# Altium PCB StabdUp.PcbDoc
Units mm, origin at the board's own origin, x right, y up, seen from the top; angles counter-clockwise.
Board outline 46.2 x 37.46 mm, 2 copper layers (Top Layer, Bottom Layer); 29 components, 31 nets, 147 pads, 159 vias.
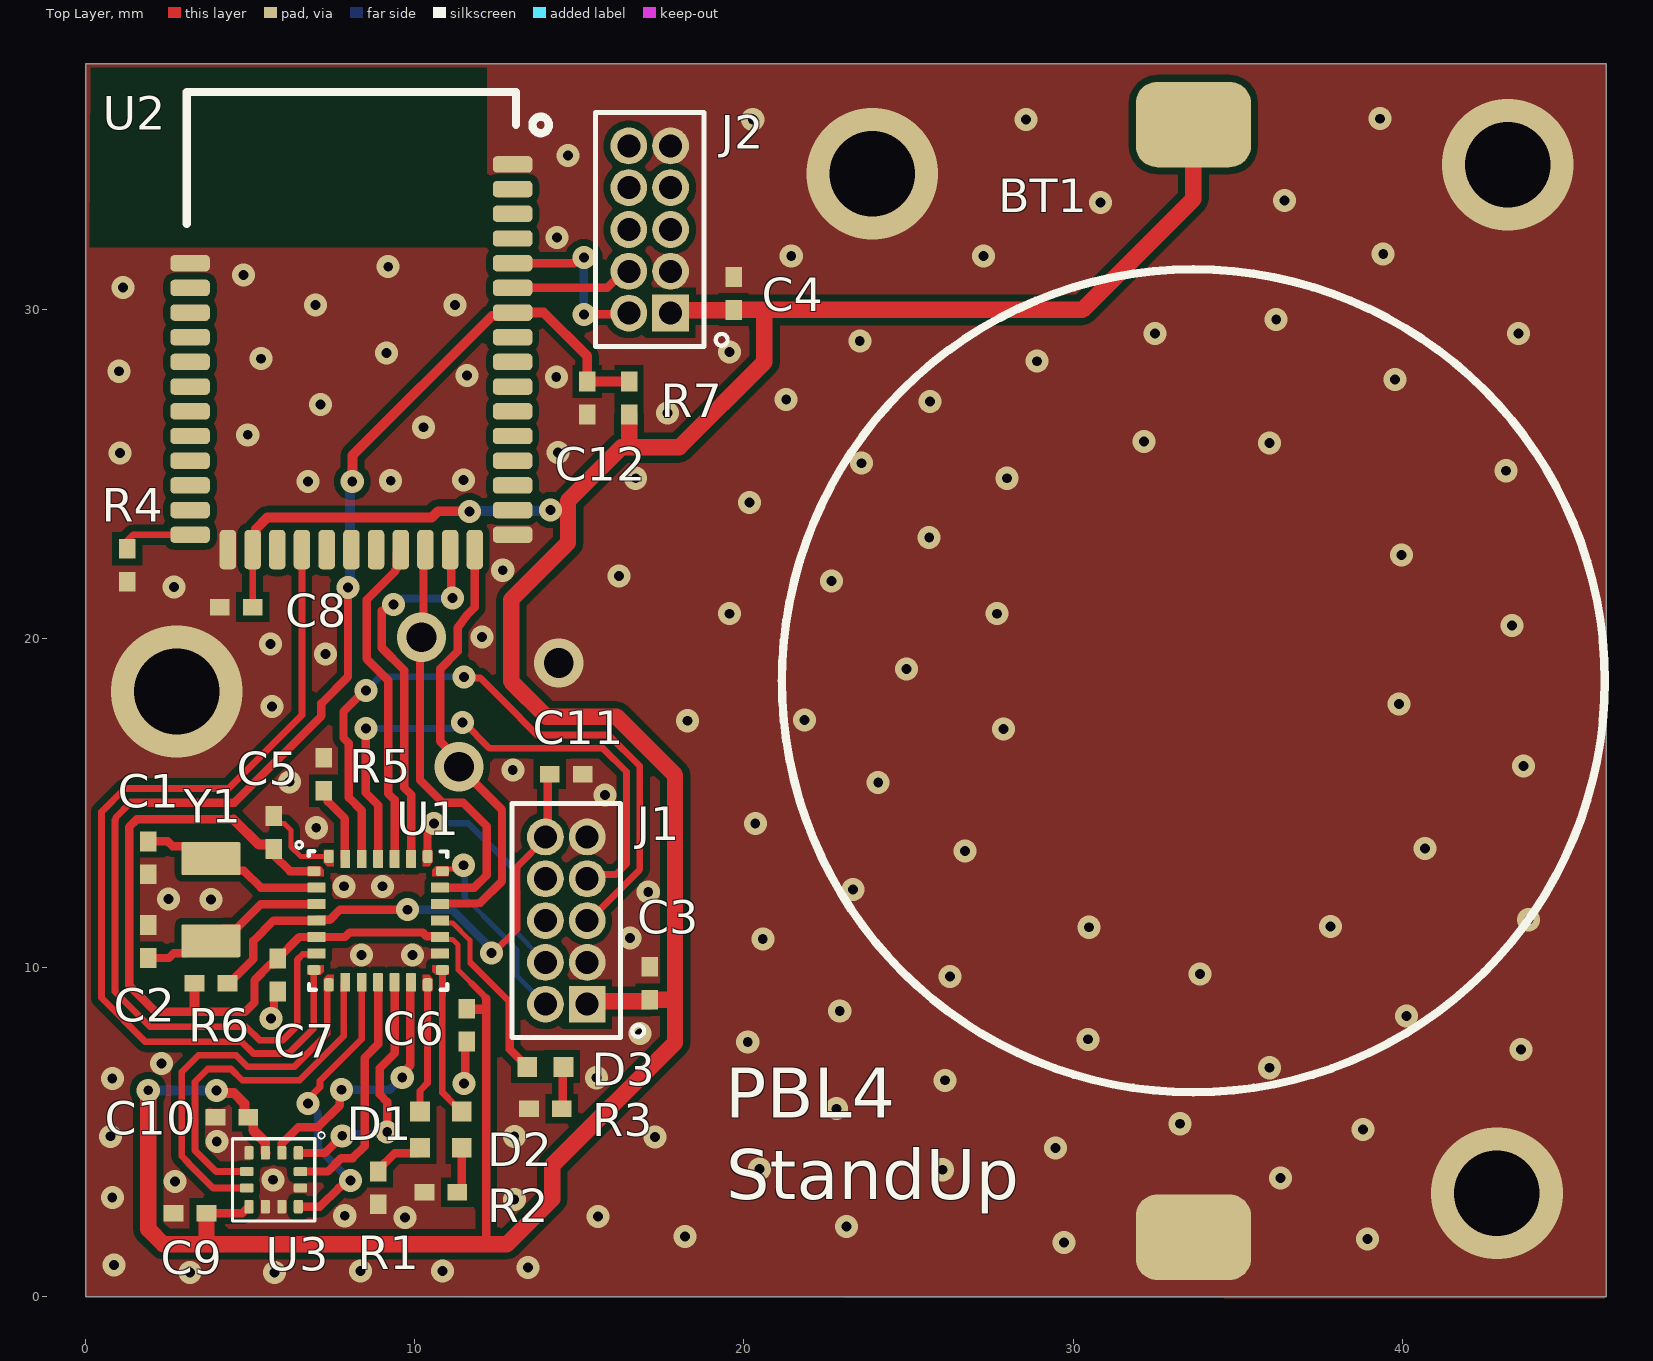
[diagram p0: Top Layer view]
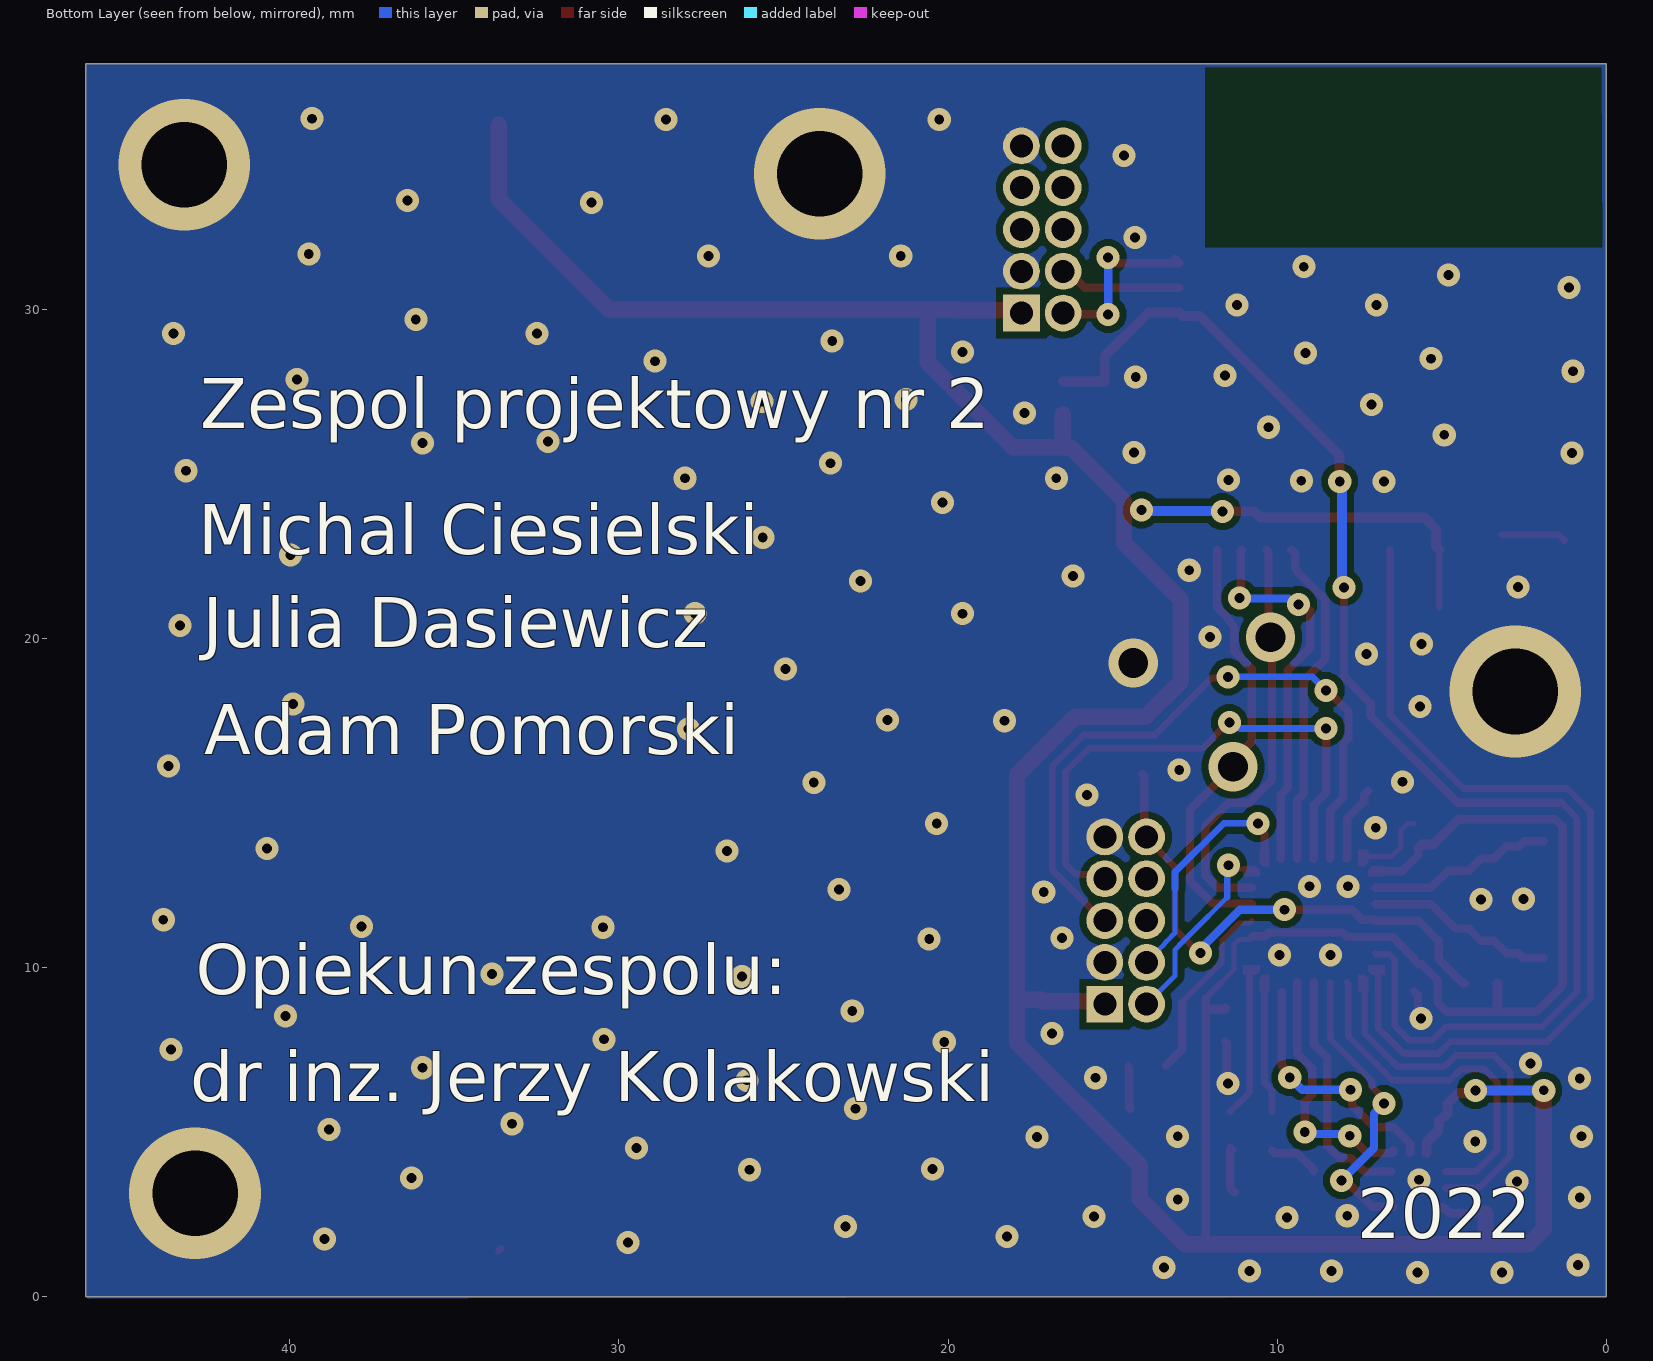
[diagram p1: Bottom Layer view, seen from below]

## Layer stack, top to bottom
Top Solder: solder mask 0.0102, Solder Resist, Dk 3.5
Top Layer: signal copper 0.0356
Dielectric 1: dielectric 0.32, FR-4, Dk 4.8
Bottom Layer: signal copper 0.0356
Bottom Solder: solder mask 0.0102, Solder Resist, Dk 3.5

## Board outline
0,0 0,37.465 46.203,37.465 46.203,0

## Design rules (kind name [scope] priority, off if disabled: settings)
Clearance [All] p1: gap=0.203 ignorepadtopadclearanceinfootprint=TRUE
HoleSize [All] p1: absolutevalues=TRUE maxlimit=2.6 minlimit=0.025 maxpercent=80.000 minpercent=20.000
PolygonConnect [All] p1: connectstyle=Direct reliefconductorwidth=0.254 reliefentries=4 polygonreliefangle="90 Angle" airgapwidth=0.254
RoutingVias [All] p1: holewidth=0.711 width=1.27 viastyle="Through Hole" minholewidth=0.711 minwidth=1.27 maxholewidth=0.711 maxwidth=1.27
SolderMaskExpansion [All] p1: expansion=0.102 istentingtop=FALSE
Width [All] p1: maxlimit=0.5 minlimit=0.15 preferedwidth=0.254
29 further rules are at their usual default settings.

## Components (designator, comment, footprint, x,y, rotation, side; value= is the part's Value field where it differs from the comment)
BT1 "SMTU2450N_LF" SMTU2450N_LF 33.655,18.711 r90 top locked
C1 "Cap Semi" 0402 1.905,13.335 r90 top value=12pF
C2 "Cap Semi" 0402 1.905,10.795 r270 top value=12pF
C3 "Cap Semi" 0402 17.145,9.525 r90 top value=100nF
C4 "Cap Semi" 0402 19.685,30.48 r90 top value=100nF
C5 "" 0402 5.715,14.105 r270 top value=100nF
C6 "" 0402 11.582,8.255 r90 top value=100nF
C7 "" 0402 5.842,9.779 r90 top value=100nF
C8 "" 0402 4.58,20.955 r0 top value=100nF
C9 "" 0402 3.175,2.54 r0 top value=100nF
C10 "" 0402 4.445,5.461 r0 top value=100nF
C11 "Cap Semi" 0402 14.605,15.875 r180 top value=100nF
C12 "Cap Semi" 0402 15.24,27.305 r270 top value=100nF
D1 "LED2" MC_DIODE 10.16,5.08 r270 top
D2 "LED2" MC_DIODE 11.43,5.08 r270 top
D3 "LED2" MC_DIODE 13.97,6.985 r0 top
J1 "Cortez JTAG_UART" MC_JTAG 14.605,11.43 r0 top
J2 "Cortez JTAG_UART" MC_JTAG 17.139,32.424 r0 top
R1 "Res3" 0402 8.89,3.31 r90 top value=220
R2 "Res3" 0402 10.795,3.175 r0 top value=220
R3 "Res3" 0402 13.97,5.715 r0 top value=220
R4 "Res3" 0402 1.27,22.225 r90 top value=0
R5 "Res3" 0402 7.239,15.875 r270 top value=1K
R6 "Res3" 0402 3.81,9.525 r180 top value=1K
R7 "Res3" 0402 16.51,27.305 r270 top value=1K
U1 "STM32L031G6U7" MC_UFQFPN-28 8.89,11.43 r0 top
U2 "BL652-SA" BL652 8.075,29.6 r0 top locked
U3 "BMA280" JD_LGA 5.715,3.556 r270 top
Y1 "XTAL" MC_XTAL 3.81,12.065 r270 top

## Footprints (in the part's own frame and the unit in brackets; to place one, negate y for a bottom-side part, rotate by r counter-clockwise, add the part's x,y. Pads: shape width x height; smd on the part's side, far side on the other; paste and mask are expansions set on the pad)
0402 [mm] "Chip Capacitor, Body 1.0x0.5mm, IPC High Density"
  rect 0.6x0.5 smd: 1(-0.5,0) 2(0.5,0)
  body extent -0.55,-0.3 0.55,0.3, height 1.3
BL652 [mm]
  rrect50% 1.2x0.5 smd: 1(4.9,4.8) 2(4.9,4.05) 3(4.9,3.3) 4(4.9,2.55) 5(4.9,1.8) 6(4.9,1.05) 7(4.9,0.3) 8(4.9,-0.45) 9(4.9,-1.2) 10(4.9,-1.95) 11(4.9,-2.7) 12(4.9,-3.45) 13(4.9,-4.2) 14(4.9,-4.95) 15(4.9,-5.7) 16(4.9,-6.45) 28(-4.9,-6.45) 29(-4.9,-5.7) 30(-4.9,-4.95) 31(-4.9,-4.2) 32(-4.9,-3.45) 33(-4.9,-2.7) 34(-4.9,-1.95) 35(-4.9,-1.2) 36(-4.9,-0.45) 37(-4.9,0.3) 38(-4.9,1.05) 39(-4.9,1.8)
  rrect50% 0.5x1.2 smd: 17(3.75,-6.9) 18(3,-6.9) 19(2.25,-6.9) 20(1.5,-6.9) 21(0.75,-6.9) 22(0,-6.9) 23(-0.75,-6.9) 24(-1.5,-6.9) 25(-2.25,-6.9) 26(-3,-6.9) 27(-3.75,-6.9)
  silkscreen extent -5,3 6,7
JD_LGA [mm] "JD_LGA"
  rrect30% 0.41x0.28 smd: 1(-0.815,0.75) 2(-0.815,0.25) 3(-0.815,-0.25) 4(-0.815,-0.75) 7(0.815,-0.75) 8(0.815,-0.25) 9(0.815,0.25) 10(0.815,0.75)
  rrect30% 0.28x0.41 smd: 5(-0.25,-0.815) 6(0.25,-0.815) 11(0.25,0.815) 12(-0.25,0.815)
  silkscreen extent -1.45,-1.25 1.25,1.55
MC_DIODE [mm]
  rect 0.6x0.6 smd: 1(-0.55,0) 2(0.55,0)
MC_JTAG [mm]
  rect 1.12x1.12 hole 0.7: 1(0.635,-2.54)
  round 1.12 hole 0.7: 2(-0.635,-2.54) 3(0.635,-1.27) 4(-0.635,-1.27) 5(0.635,0) 6(-0.635,0) 7(0.635,1.27) 8(-0.635,1.27) 9(0.635,2.54) 10(-0.635,2.54)
  silkscreen extent -1.65,-3.56 2.36,3.56
MC_UFQFPN-28 [mm]
  rrect50% 0.4x0.3 smd: 1(-1.95,1.5) 7(-1.95,-1.5) 15(1.95,-1.5) 21(1.95,1.5)
  rrect10% 0.55x0.3 smd: 2(-1.875,1) 3(-1.875,0.5) 4(-1.875,0) 5(-1.875,-0.5) 6(-1.875,-1) 16(1.875,-1) 17(1.875,-0.5) 18(1.875,0) 19(1.875,0.5) 20(1.875,1)
  rrect50% 0.3x0.4 smd: 8(-1.5,-1.95) 14(1.5,-1.95) 22(1.5,1.95) 28(-1.5,1.95)
  rrect10% 0.3x0.55 smd: 9(-1,-1.875) 10(-0.5,-1.875) 11(0,-1.875) 12(0.5,-1.875) 13(1,-1.875) 23(1,1.875) 24(0.5,1.875) 25(0,1.875) 26(-0.5,1.875) 27(-1,1.875)
  Top Layer region: 1.35,-1.65 1.55,-1.65 1.65,-1.75 1.65,-2.15 1.35,-2.15
  Top Layer region: -1.35,-1.65 -1.55,-1.65 -1.65,-1.75 -1.65,-2.15 -1.35,-2.15
  Top Layer region: -1.65,2.15 -1.65,1.75 -1.55,1.65 -1.35,1.65 -1.35,2.15
  Top Layer region: 1.35,2.15 1.35,1.65 1.55,1.65 1.65,1.75 1.65,2.15
  Top Layer region: 1.65,1.55 1.75,1.65 2.15,1.65 2.15,1.35 1.65,1.35
  Top Layer region: -2.15,-1.35 -2.15,-1.65 -1.75,-1.65 -1.65,-1.55 -1.65,-1.35
  Top Layer region: 1.65,-1.35 2.15,-1.35 2.15,-1.65 1.75,-1.65 1.65,-1.55
  Top Layer region: -2.15,1.65 -1.75,1.65 -1.65,1.55 -1.65,1.35 -2.15,1.35
  silkscreen extent -2.5,-2.1 2.1,2.4
MC_XTAL [mm]
  rrect10% 1x1.8 smd: 1(-1.25,0) 2(1.25,0)
SMTU2450N_LF [mm]
  rrect50% 2.6x3.5 smd: 1(-16.9,0) 2(16.9,0)
  silkscreen extent -12.5,-12.5 12.5,12.5

## Part data
BT1: Capacity=620mAh, Voltage=3V
C1 C2 C3 C4 C11 C12: "Capacitor (Semiconductor SIM Model)", LatestRevisionDate=29-May-2009, LatestRevisionNote="IPC-7351 Footprint Added.", PackageDescription="Chip Capacitor", PackageReference=C1206, Published=8-Jun-2000, Publisher="Altium Limited"
C5 C6 C7 C8 C9 C10: library part "Cap Semi", "Capacitor (Semiconductor SIM Model)", LatestRevisionDate=29-May-2009, LatestRevisionNote="IPC-7351 Footprint Added.", PackageDescription="Chip Capacitor", PackageReference=C1206, Published=8-Jun-2000, Publisher="Altium Limited"
D1 D2 D3: "Typical RED, GREEN, YELLOW, AMBER GaAs LED", LatestRevisionDate=17-Jul-2002, LatestRevisionNote="Re-released for DXP Platform.", PackageDescription="SM LED; 2 Flat Leads", PackageReference=3.2X1.6X1.1, PackageVersion=Feb-2002, Published=8-Jun-2000, Publisher="Altium Limited"
J1 J2: library part MC_JTAG
R1 R2 R3 R4 R5 R6 R7: "Resistor", LatestRevisionDate=29-May-2009, LatestRevisionNote="IPC-7351 Footprint Added.", PackageDescription="Chip Resistor", PackageReference=J1-0603, Published=8-Jun-2000, Publisher="Altium Limited"
U1: library part MC_STM32L031G6U7
U2: library part BL652
U3: library part JD_BMA280
Y1: "Crystal Oscillator", Frequency="32K768 Hz", LatestRevisionDate=17-Jul-2002, LatestRevisionNote="Re-released for DXP Platform.", PackageDescription="Crystal, Thru-Hole; 2 Leads; Body 3.1 x 8.2 mm (Dia.xH)", Published=8-Jun-2000, Publisher="Altium Limited"

## Via types
v1: diameter 0.7, hole 0.3, Top Layer to Bottom Layer, tented both sides, 152 vias
v2: diameter 4, hole 2.6, Top Layer to Bottom Layer, 4 vias
v3: diameter 1.5, hole 0.9, Top Layer to Bottom Layer, tented bottom, 3 vias

## Nets (pads, with @x,y where several pads share a name; then routed paths per layer and width w, separated by ;. In a path a pad name is that pad's centre, name@x,y a point inside that pad or via, vN(x,y) a via of type N, cw(c..) or ccw(c..) an arc to the next point about the centre after c; other vN are vias at no path point)
BLE_RESET: C12.1 R7.1 U1.6 U2.7 | length 41.6
  Top Layer w0.203: 1.372,15.011 0.914,14.554 0.914,14.503 0.893,14.482 0.893,9.267 1.956,8.204 4.877,8.204 5.283,7.798 5.994,7.798 6.435,8.239 6.435,10.242 6.599,10.406 6.991,10.406 U1.6
  Top Layer w0.254: 1.372,15.011 4.527,15.011 7.163,17.648 7.163,18.026 7.973,18.837 v1(7.973,21.547)
  Top Layer w0.3: v1(8.103,24.765) 8.114,24.776 8.114,25.565 12.349,29.8 12.875,29.8 U2.7 13.915,29.9 15.24,28.575 C12.1 R7.1
  Bottom Layer w0.3: v1(7.973,21.547) 8.038,21.612 8.038,24.7 v1(8.103,24.765)
GND: BT1.1 C1.1 C2.1 C3.2 C4.2 C5.1 C6.1 C7.1 C8.1 C9.1 C10.1 C11.1 C12.2 J1.3 J1.9 J2.3 J2.9 R1.1 R2.1 R3.1 R4.1 R5.1 U1.16 U1.28 U2.1 U2.16 U2.27 U2.39 U3.4 U3.8 U3.9 U3.11 | length 4.7
  Top Layer w0.15: C5.1@5.842,14.376 6.045,14.376 6.243,14.178 6.243,13.665 6.528,13.38 U1.28
  Top Layer w0.203: BT1.1@33.57,1.473 BT1.1@33.655,1.388
  Top Layer w0.254: v1(5.639,8.453) 5.724,8.538 5.724,9.161 C7.1 ; v1(11.495,6.483) 11.539,6.527 11.539,7.711 C6.1 ; J2.3@17.78,31.115 J2.3@17.848,31.047 ; J2.9@17.78,34.925 J2.9@17.805,34.9
  other v1: 3.175,0.737 5.74,0.737 8.357,0.787 10.846,0.787 13.437,0.889 0.864,0.965 29.718,1.651 38.938,1.753 18.212,1.829 23.114,2.134 9.703,2.413 15.57,2.438 7.874,2.464 13.025,2.959 0.813,3.023 2.718,3.505 5.69,3.556 36.297,3.607 26.035,3.861 20.472,3.886 29.464,4.521 3.988,4.724 17.297,4.851 0.762,4.877 13.025,4.877 38.811,5.08 33.249,5.258 22.809,5.715 26.111,6.579 0.813,6.629 15.519,6.655 35.966,6.96 2.311,7.087 43.612,7.518 20.117,7.747 30.455,7.823 16.84,8.001 40.132,8.534 22.911,8.687 26.264,9.728 33.858,9.804 8.382,10.389 9.931,10.389 20.574,10.871 16.535,10.897 30.48,11.227 37.821,11.252 43.84,11.455 3.81,12.065 2.515,12.09 17.094,12.294 23.317,12.37 7.849,12.471 9.017,12.471 26.721,13.538 40.691,13.614 7.01,14.249 20.345,14.376 15.779,15.24 24.079,15.621 6.198,15.646 12.979,16.002 43.688,16.129 27.889,17.247 18.288,17.501 21.844,17.526 5.664,17.932 39.903,18.009 24.943,19.075 7.29,19.533 5.613,19.837 12.039,20.046 43.332,20.396 19.558,20.752 27.686,20.752 2.692,21.565 22.657,21.742 16.205,21.895 12.675,22.073 39.98,22.53 25.629,23.063 20.168,24.13 6.756,24.765 9.271,24.79 11.481,24.816 16.713,24.867 27.991,24.867 43.155,25.095 23.571,25.324 1.041,25.629 14.351,25.654 35.966,25.933 32.156,25.984 4.928,26.187 10.262,26.416 17.678,26.848 7.137,27.102 25.654,27.203 21.285,27.254 39.776,27.864 14.3,27.94 11.582,27.991 1.016,28.118 28.905,28.423 5.334,28.499 9.144,28.677 19.558,28.702 23.52,29.032 32.487,29.261 43.536,29.261 36.17,29.693 6.985,30.124 11.227,30.124 1.143,30.658 4.801,31.039 9.195,31.293 21.438,31.623 27.28,31.623 39.421,31.674 14.326,32.182 30.836,33.249 36.424,33.299 14.656,34.671 20.269,35.763 28.575,35.763 39.319,35.789
  other v2: 42.875,3.15 2.769,18.39 23.901,34.112 43.205,34.392
  other v3: 14.376,19.253
INT1: U1.9 U3.5 | length 11
  Top Layer w0.203: U3.5 3.966,3.806 3.327,4.445 3.327,6.535 3.711,6.919 4.419,6.919 4.759,6.579 6.502,6.579 7.845,7.921 7.845,9.51 U1.9
INT2: U1.8 U3.6 | length 11.6
  Top Layer w0.203: U3.6 3.877,3.306 3.118,4.065 3.118,4.08 2.921,4.277 2.921,6.833 3.429,7.341 4.572,7.341 4.928,6.985 6.331,6.985 7.342,7.996 7.342,9.432 U1.8
LED1: D1.1 U1.14 | length 3.9
  Top Layer w0.203: D1.1 10.16,6.261 10.39,6.491 U1.14
LED2: D2.1 U1.15 | length 4.6
  Top Layer w0.203: U1.15 10.845,9.925 10.845,9.154 10.84,9.149 10.84,6.204 11.215,5.828 11.232,5.828 D2.1
LED3: D3.1 U1.18 | length 5.6
  Top Layer w0.152: U1.18 10.836,11.359 11.15,11.359 11.675,10.834 11.675,10.52 11.675,10.194 11.7,10.169
  Top Layer w0.203: 11.7,10.144 12.888,8.956
  Top Layer w0.254: 12.888,8.956 12.888,7.517 D3.1@13.378,7.027
"mCU-BLE (opc.)": U1.7 U2.24 | length 27.2
  Top Layer w0.203: U2.24 6.575,17.67 4.348,15.443 1.193,15.443 0.483,14.733 0.483,9.085 1.821,7.747 4.744,7.747 5.1,7.391 6.163,7.391 6.935,8.164 6.935,9.882 6.94,9.886 U1.7
NetC1_2: C1.2 U1.2 Y1.1 | length 5.7
  Top Layer w0.254: C1.2 2.497,13.835 2.642,13.691 2.888,13.691 2.891,13.688 3.037,13.688 3.41,13.315 Y1.1 4.183,12.942 4.813,12.942 5.325,12.43 U1.2
NetC2_2: C2.2 U1.3 Y1.2 | length 5.8
  Top Layer w0.254: C2.2 2.536,10.295 2.683,10.442 3.037,10.442 3.41,10.815 Y1.2 4.183,11.188 4.584,11.188 5.326,11.93 U1.3
NetR4_2: R4.2 U2.28 | length 2
  Top Layer w0.203: R4.2@1.27,22.975 1.445,23.15 U2.28
NetR5_2: R5.2 U1.27 | length 2.3
  Top Layer w0.254: R5.2 7.362,15.252 7.362,15.041 7.877,14.526 7.877,13.318 U1.27
R1: D1.2 R1.2 | length 1.6
  Top Layer w0.254: R1.2 8.89,3.86 9.387,4.357 10.072,4.357 D1.2@10.16,4.445
R2: D2.2 R2.2 | length 1.5
  Top Layer w0.254: R2.2 11.307,3.175 11.43,3.298 D2.2 D2.2@11.363,4.463
R3: D3.2 R3.2 | length 1.3
  Top Layer w0.254: R3.2 14.495,5.74 14.495,6.96 D3.2
RESET_mCU: C11.2 J1.10 R6.1 U1.4 | length 16.1
  Top Layer w0.203: v1(12.33,10.439) 12.38,10.439 13.105,11.165 13.105,12.7 13.105,12.744 13.106,12.746 13.106,13.061 J1.10@13.976,13.931
  Top Layer w0.254: R6.1 4.36,9.525 5.099,10.264 5.099,10.814 5.715,11.43 U1.4 7.035,11.45 7.418,11.45 7.728,11.76 v1(9.779,11.76) ; J1.10@13.976,13.931 14.041,13.995 14.041,15.811 C11.2
  Bottom Layer w0.254: v1(9.779,11.76) 11.13,11.76 12.33,10.56 v1(12.33,10.439)
RX_mCU: J1.5 U1.26 | length 20.7
  Top Layer w0.203: v1(11.495,18.833) 11.526,18.802 11.995,18.802 13.202,17.594 13.202,17.582 13.716,17.069 15.891,17.069 16.84,16.12 16.84,12.985 J1.5@15.246,11.391
  Top Layer w0.254: U1.26 8.39,14.775 8.001,15.164 8.001,16.815 7.834,16.981 7.834,17.782 8.468,18.416 v1(8.515,18.416)
  Bottom Layer w0.203: v1(8.515,18.416) 8.931,18.833 v1(11.495,18.833)
SPI_CLK: U1.11 U3.12 | length 7.4
  Top Layer w0.254: U3.12 7.362,3.806 7.768,4.212 8.116,4.212 8.484,4.58 8.484,7.267 8.89,7.674 U1.11
SPI_MISO: U1.12 U3.1 | length 7.9
  Top Layer w0.254: U3.1@6.478,4.449 6.478,4.371 7.276,4.371 v1(7.798,4.893) ; v1(9.164,5.004) 9.164,5.924 8.941,6.147 8.941,6.947 9.39,7.397 U1.12
  Bottom Layer w0.254: v1(7.798,4.893) 7.853,4.948 9.108,4.948 v1(9.164,5.004)
SPI_MOSI: U1.13 U3.2 | length 7.7
  Top Layer w0.254: U3.2 5.965,4.658 6.463,5.156 7.061,5.156 7.724,5.819 7.724,6.238 v1(7.778,6.291) ; v1(9.621,6.666) 9.621,6.786 9.869,7.035 9.869,9.255
  Bottom Layer w0.254: v1(7.778,6.291) 9.247,6.291 v1(9.621,6.666)
SPI_NSS: U1.10 U3.10 | length 9.1
  Top Layer w0.203: v1(6.756,5.867) 6.756,6.002 7.123,6.369 7.123,6.563 8.39,7.829 U1.10@8.39,9.547
  Top Layer w0.254: U3.10 7.123,2.741 7.694,3.312 7.71,3.312 7.93,3.532 v1(8.05,3.532)
  Bottom Layer w0.254: v1(6.756,5.867) 6.842,5.782 7.061,5.563 7.061,4.521 v1(8.05,3.532)
SWCLK_BLE: J2.4 U2.6 | length 3.7
  Top Layer w0.254: U2.6 15.843,30.65 16.308,31.115 J2.4@16.51,31.115
SWCLK_mCU: J1.4 U1.22 | length 7.4
  Top Layer w0.152: J1.4@13.858,10.121 J1.4@13.976,10.121
  Top Layer w0.254: U1.22 10.39,14.069 10.584,14.263 v1(10.584,14.384)
  Bottom Layer w0.152: 13.105,11.059 13.376,10.789 cw(c13.268,10.681) 13.384,10.779 13.489,10.655 ccw(c13.606,10.753) 13.496,10.647 ; 13.496,10.646 J1.4
  Bottom Layer w0.154: 13.105,11.059 13.105,12.391
  Bottom Layer w0.203: v1(10.584,14.384) 11.626,14.384 13.105,12.904 13.105,12.391
SWDIO_BLE: J2.2 U2.5 | length 5.5
  Top Layer w0.254: U2.5@13.098,31.523 U2.5 14.846,31.4 15.018,31.572 v1(15.138,31.572) ; v1(15.138,29.845) J2.2@16.51,29.845
  Bottom Layer w0.254: v1(15.138,29.845) v1(15.138,31.572)
SWDIO_mCU: J1.2 U1.21 | length 6
  Top Layer w0.152: U1.21 10.914,13.004 11.228,13.004 11.335,13.11 v1(11.483,13.11)
  Bottom Layer w0.152: 11.521,12.139 11.521,12.137 12.603,11.055 12.605,11.055 12.984,10.676 12.984,10.663 13.106,10.541 13.106,9.754 J1.2
  Bottom Layer w0.203: v1(11.483,13.11) 11.521,13.072 11.521,12.139
TX_mCU: J1.7 U1.25 | length 16.9
  Top Layer w0.203: v1(11.456,17.442) 11.496,17.442 12.275,16.662 15.723,16.662 16.434,15.951 16.434,13.153 16.111,12.83 15.416,12.83 J1.7@15.246,12.661
  Top Layer w0.254: v1(8.515,17.263) 8.515,15.311 8.89,14.935 U1.25
  Bottom Layer w0.203: v1(8.515,17.263) 11.142,17.263 11.321,17.442 v1(11.456,17.442)
UART_CTS: U1.24 U2.20 | length 10.2
  Top Layer w0.254: U1.24 9.39,15.096 9.195,15.291 9.195,18.73 8.541,19.384 8.541,21.172 9.405,22.036 9.405,22.078 9.452,22.125 9.452,22.577 U2.20
UART_RTS: U1.23 U2.18 | length 11.7
  Top Layer w0.254: v1(9.359,21.029) 9.239,21.029 9.051,20.841 8.998,20.841 8.998,19.717 9.678,19.037 9.678,15.468 9.89,15.256 U1.23 ; U2.18 11.11,22.665 11.11,21.269 v1(11.145,21.234)
  Bottom Layer w0.254: v1(9.359,21.029) 9.47,21.029 9.655,21.213 11.124,21.213 v1(11.145,21.234)
UART_RX: U1.20 U2.19 | length 12.7
  Top Layer w0.254: v3@10.194,20.049 10.265,20.12 10.265,22.64 U2.19 ; v3(10.205,20.037) 10.16,19.992 10.16,15.697 10.846,15.011 11.469,15.011 12.19,14.291 12.19,12.812 11.808,12.43 U1.20
UART_TX: U1.19 U2.17 | length 13.4
  Top Layer w0.254: U1.19 10.785,11.95 11.869,11.95 11.997,11.973 12.649,12.625 12.649,14.797 v3(11.344,16.102) 11.344,16.305 10.775,16.874 10.775,19.076 11.303,19.603 11.303,20.316 11.591,20.718 11.825,20.952 11.825,21.516 U2.17
VCC: BT1.2 C3.1 C4.1 C5.2 C6.2 C7.2 C8.2 C9.2 C10.2 J1.1 J2.1 R6.2 R7.2 U1.1 U1.5 U1.17 U2.26 U3.3 U3.7 | length 129.7
  Top Layer w0.152: U1.17@10.81,10.885 10.836,10.859 11.147,10.859 11.319,10.687 11.319,9.93 11.739,9.51
  Top Layer w0.203: U2.26 5.078,22.698 5.078,20.957 C8.2 ; U1.17 U1.17@10.81,10.885 ; 11.739,9.51 12.159,9.091 12.159,9.075
  Top Layer w0.254: C9.2 4.764,2.54 4.887,2.663 4.952,2.663 4.965,2.676 U3.7 ; 4.496,14.503 1.556,14.503 1.325,14.272 1.325,9.465 2.134,8.656 4.846,8.656 5.131,8.941 5.131,9.618 5.619,10.106 5.719,10.106 5.842,10.229 C7.2 6.493,10.93 U1.5 7.882,10.93 8.021,11.069 10.243,11.069 10.362,10.95 10.745,10.95 U1.17 ; C5.2@5.715,13.42 6.205,12.93 U1.1 ; 12.159,9.075 12.175,9.058 12.175,1.609 12.167,1.6
  Top Layer w0.3: 3.31,8.692 R6.2 ; v1(3.982,6.264) 4.059,6.188 4.506,6.188 4.826,5.867 4.826,5.561 4.926,5.461 C10.2 ; 4.496,14.503 5.261,13.738 5.615,13.738 5.715,13.638 C5.2 ; U2.26 5.175,22.8 5.175,23.326 5.522,23.673 10.516,23.673 10.709,23.866 11.645,23.866 v1(11.659,23.852) ; C10.2@5.095,5.361 5.095,5.061 5.458,4.698 5.458,4.378 U3.3 ; C6.2 11.6,8.738 12.04,8.738 ; v1(14.128,23.901) 14.656,23.901 ; 16.561,8.975 16.612,8.924
  Top Layer w0.5: v1(1.905,6.274) 1.905,2.057 2.362,1.6 3.675,1.6 ; C9.2 3.675,1.6 ; J1.1@15.246,8.851 15.37,8.975 16.561,8.975 C3.1@17.145,8.975 ; R7.2 16.51,25.832 16.535,25.806 ; C3.1 17.89,9.025 17.907,9.042 ; J2.1@17.78,29.845 17.907,29.972 19.685,29.972 C4.1 20.625,29.98 ; BT1.2 33.655,33.35 30.285,29.98 20.625,29.98 ; 3.675,1.6 12.167,1.6 12.802,1.6 14.173,2.972 14.173,3.988 17.907,7.722 17.907,9.042 ; 16.535,25.806 16.281,25.806 14.656,24.181 14.656,23.901 14.656,22.905 12.929,21.178 12.929,18.694 13.995,17.628 16.129,17.628 17.907,15.85 17.907,9.042 ; 16.535,25.806 18.034,25.806 20.625,28.397 20.625,29.98
  Bottom Layer w0.3: v1(1.905,6.274) 1.91,6.269 3.977,6.269 v1(3.982,6.264) ; v1(11.659,23.852) 11.683,23.877 14.103,23.877 v1(14.128,23.901)
pads on no net: J1.6 J1.8 J2.5 J2.6 J2.7 J2.8 J2.10 U2.2 U2.3 U2.4 U2.8 U2.9 U2.10 U2.11 U2.12 U2.13 U2.14 U2.15 U2.21 U2.22 U2.23 U2.25 U2.29 U2.30 U2.31 U2.32 U2.33 U2.34 U2.35 U2.36 U2.37 U2.38

## Polygon pours and split planes (outlines as drawn)
GND on Bottom Layer "GND_L02_P001" (solid, pour order 1): 0,0 0,37.465 46.203,37.465 46.203,-0.051
GND on Top Layer "GND_L01_P002" (solid, pour order 2): 0,0 0,37.465 46.203,37.465 46.203,-0.051

## Other copper
Top Layer:
  pour cut-out: 0.127,31.877 12.192,31.877 12.192,37.338 0.152,37.338 0.152,37.313
Bottom Layer:
  pour cut-out: 0.127,31.877 12.192,31.877 12.192,37.338 0.178,37.338 0.152,37.313

## Silkscreen, mask and mechanical layers (free items; w line width, h text height)
Top Overlay:
  text "PBL4" at 19.431,5.436 h1.52
  text "StandUp" at 19.456,2.972 h1.52
Bottom Overlay:
  text "Zespol projektowy nr 2" at 42.723,26.39 h1.52
  text "Michal Ciesielski" at 42.774,22.555 h1.52
  text "Julia Dasiewicz" at 42.647,19.736 h1.52
  text "Adam Pomorski" at 42.596,16.485 h1.52
  text "Opiekun zespolu:" at 42.85,9.195 h1.52
  text "dr inz. Jerzy Kolakowski" at 43.028,5.943 h1.52
  text "2022" at 7.569,1.778 h1.52
Top Solder:
  rectangle: 10.439,9.677 11.151,13.183
  rectangle: 6.629,9.677 7.391,13.183
  rectangle: 7.137,9.169 10.643,9.931
  rectangle: 7.137,12.929 10.643,13.691
  rectangle: 11.227,7.341 11.938,9.169
  rectangle: 4.59,2.438 5.207,4.674
  rectangle: 6.198,2.438 6.839,4.674
  rectangle: 6.883,14.986 7.595,16.764
  rectangle: 5.359,13.208 6.071,15.011
  rectangle: 1.549,12.446 2.261,14.224
  rectangle: 2.921,9.169 4.699,9.881
  rectangle: 5.486,8.89 6.198,10.668
  rectangle: 1.549,9.906 2.261,11.684
  rectangle: 3.556,5.105 5.334,5.817
  rectangle: 2.261,2.184 4.039,2.896
  rectangle: 8.534,2.413 9.246,4.216
  rectangle: 9.906,2.819 11.684,3.531
  rectangle: 13.081,5.359 14.859,6.071
  rectangle: 16.789,8.636 17.501,10.414
  rectangle: 13.716,15.519 15.519,16.231
  rectangle: 19.329,29.566 20.041,31.394
  rectangle: 16.154,26.391 16.866,28.194
  rectangle: 14.884,26.416 15.596,28.194
  rectangle: 3.683,20.599 5.486,21.311
  rectangle: 0.914,21.311 1.626,23.139
  rectangle: 4.59,2.438 6.839,3.048
  rectangle: 4.724,4.064 6.706,4.674
  rectangle: 13.36,8.23 15.875,14.554
  rectangle: 15.9,29.235 18.39,35.535
  rectangle: 2.464,22.784 3.962,31.75
  rectangle: 12.192,22.784 13.691,34.773
  rectangle: 3.937,21.996 12.217,23.419